# EAGLE board PCB (EAGLE 9.7.0)
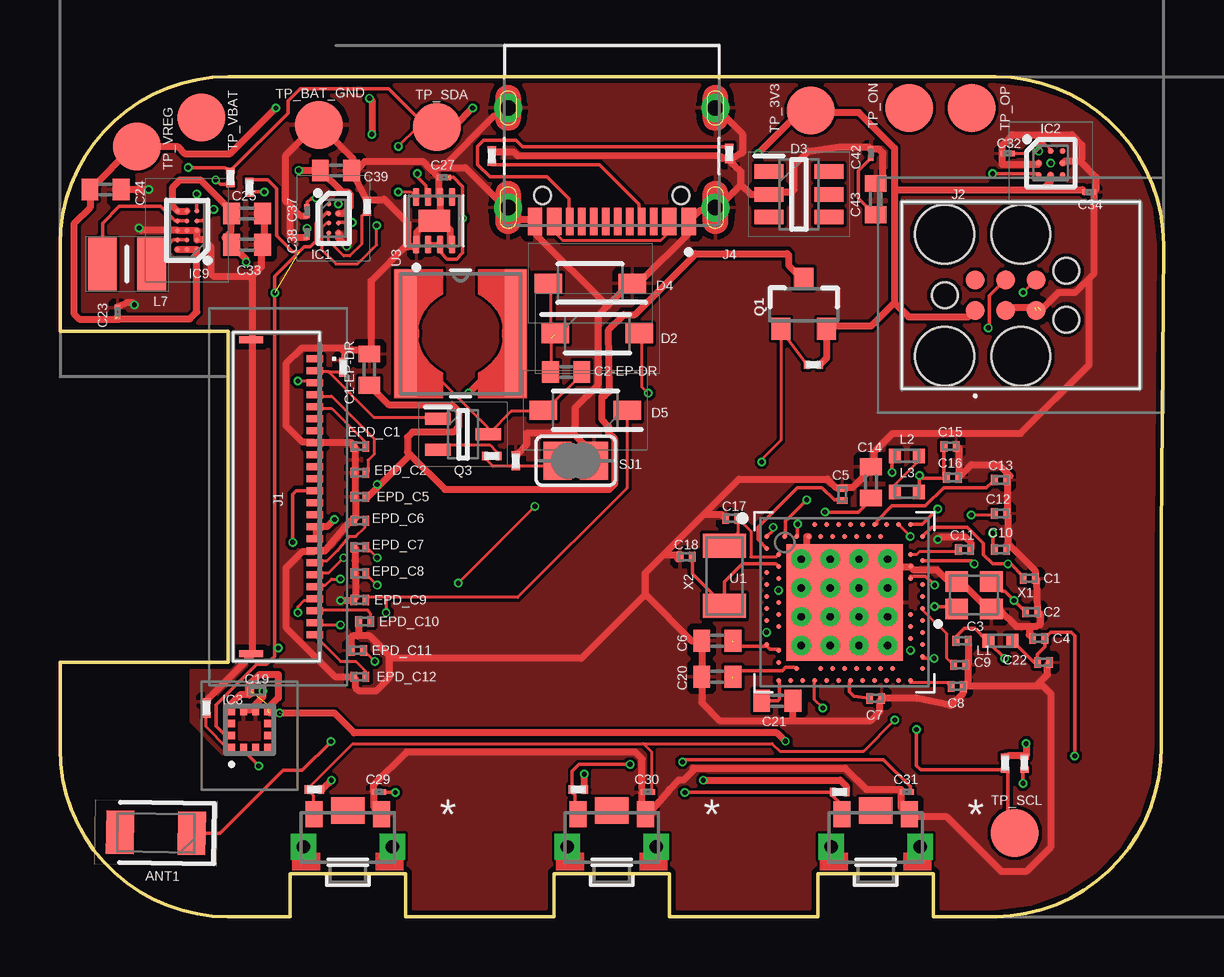
[diagram p0: board, top side]
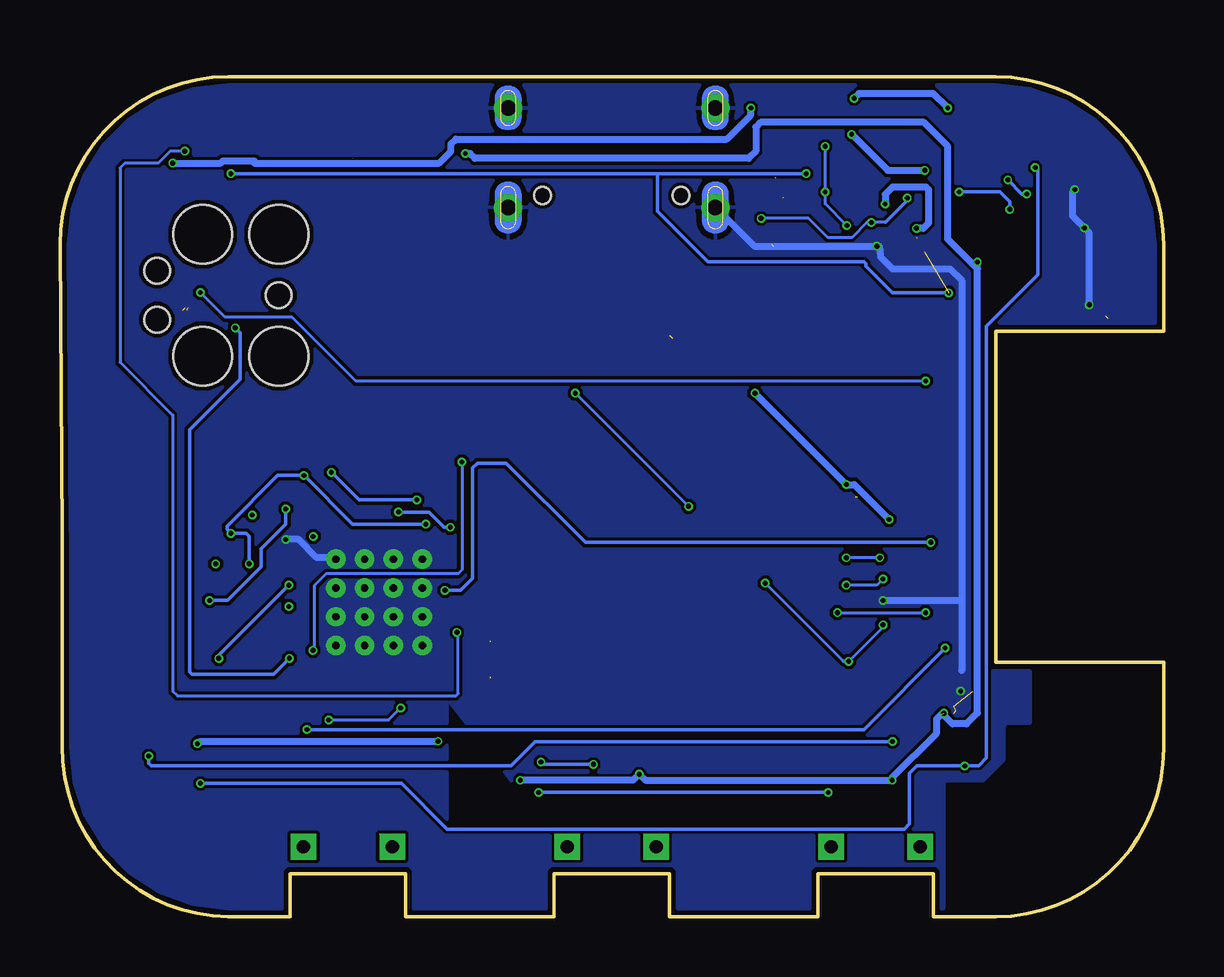
[diagram p1: board, bottom side, seen from below]

Size 46 x 35 mm. Coordinates in mm from the lower left corner, seen from the top.
Outline: 39,0 36.4,0 36.4,1.8 31.6,1.8 31.6,0 25.4,0 25.4,1.8 20.6,1.8 20.6,0 14.4,0 14.4,1.8 9.6,1.8 9.6,0 7,0 arc-90 0,7 0,10.6 7,10.6 7,24.4 0,24.4 0,28 arc-90 7,35 39,35 arc-90 46,28 45.9,15.9 45.9,7.1 arc-90 39,0
Copper layers (1+2*63+16): Top / GND / Bottom / layer 63
Stack-up 4 Layer Stack: Top SilkScreen Epoxy Ink / Top SolderMask User Defined 0.02mm Dk 4.3 / Top Surface Finish Lead-Free 0.02mm / Top User Defined 0.03mm / Dielectric-1 User Defined 0.034mm / Dielectric-2 User Defined 0.034mm / GND User Defined 0.03mm / Dielectric-3 User Defined 0.664mm / Power User Defined 0.03mm / Dielectric-4 User Defined 0.034mm / Dielectric-5 User Defined 0.034mm / Bottom User Defined 0.03mm / Bottom Surface Finish Lead-Free 0.02mm / Bottom SolderMask User Defined 0.02mm Dk 4.3 / Bottom SilkScreen Epoxy Ink
Design rules: minimum copper width 5mil, minimum drill size 0.2mm, copper clearance wire_polygon to wire_polygon 5mil, copper clearance wire_polygon to pad_smd 5mil, copper clearance wire_polygon to via 5mil, copper clearance pad_smd to pad_smd 5mil, copper clearance pad_smd to via 5mil, copper clearance via to via 5mil, copper clearance smd to pad (same net) 5mil, copper clearance smd to via (same net) 5mil, copper clearance smd to smd (same net) 5mil, dimension clearance 0.2mm, via restrict clearance 0mil, restrict clearance 0mil, drill distance 6mil, keepout clearance 0mil

## Footprints (pad centres in the part's own frame; a part is rotated, then mirrored left to right if it is on the bottom)
2450AT18B100E_ANTC3216X140N = smd 1.15 x 1.8: 1 -1.5,0; 2 1.5,0
NORDIC_NRF_3_RESC0201_L = smd 0.28 x 0.43: 1 -0.255,0; 2 0.255,0
ESP32_C6_LIBRARY_1_ESP32_WROVER_EAGLE-LTSPICE_C0402 = smd 0.7 x 0.9: 1 -0.65,0; 2 0.65,0
GRM011R60J152KE01L_2_CAPC0201X13N = smd 0.22 x 0.23: 1 -0.185,0; 2 0.185,0
ESP32_C6_LIBRARY_5_SOD3716X135N = smd 1.15 x 0.8: 1 -1.75,0; 2 1.75,0
ESP32_C6_LIBRARY_3_SOT95P280X145-6N = smd 1.2 x 0.6: 1 -1.25,0.95; 2 -1.25,0; 3 -1.25,-0.95; 4 1.25,-0.95; 5 1.25,0; 6 1.25,0.95
BQ25180YBGR_BGA8C40P2X4_100X155X50 = smd 0.2 x 0.2: A1 -0.2,0.6; A2 0.2,0.6; B1 -0.2,0.2; B2 0.2,0.2; C1 -0.2,-0.2; C2 0.2,-0.2; D1 -0.2,-0.6; D2 0.2,-0.6
DRV2605YZFR_BGA9C50P3X3_144X144X62 = smd 0.25 x 0.25: A1 -0.5,0.5; A2 0,0.5; A3 0.5,0.5; B1 -0.5,0; B2 0,0; B3 0.5,0; C1 -0.5,-0.5; C2 0,-0.5; C3 0.5,-0.5
BMA423_BMA423 = smd 0.3 x 0.35: 1 -0.75,-0.775; 2 -0.25,-0.775; 3 0.25,-0.775; 4 0.75,-0.775; 7 0.75,0.775; 8 0.25,0.775; 9 -0.25,0.775; 10 -0.75,0.775 | smd 0.35 x 0.3: 5 0.775,-0.25; 6 0.775,0.25; 11 -0.775,0.25; 12 -0.775,-0.25
RT6160AWSC_BGA15C40P3X5_140X230X60 = smd 0.216 x 0.216: A1 -0.4,0.8; A2 0,0.8; A3 0.4,0.8; B1 -0.4,0.4; B2 0,0.4; B3 0.4,0.4; C1 -0.4,0; C2 0,0; C3 0.4,0; D1 -0.4,-0.4; D2 0,-0.4; D3 0.4,-0.4; E1 -0.4,-0.8; E2 0,-0.8; E3 0.4,-0.8
503480-2400_5034802400 = smd 0.3 x 0.7: 1 -5.75,1.525; 2 -5.25,1.525; 3 -4.75,1.525; 4 -4.25,1.525; 5 -3.75,1.525; 6 -3.25,1.525; 7 -2.75,1.525; 8 -2.25,1.525; 9 -1.75,1.525; 10 -1.25,1.525; 11 -0.75,1.525; 12 -0.25,1.525; 13 0.25,1.525; 14 0.75,1.525; 15 1.25,1.525; 16 1.75,1.525; 17 2.25,1.525; 18 2.75,1.525; 19 3.25,1.525; 20 3.75,1.525; 21 4.25,1.525; 22 4.75,1.525; 23 5.25,1.525; 24 5.75,1.525 | smd 0.3 x 1: MP1 -6.54,-1.125; MP2 6.54,-1.125
TC2030-IDC_TC2030IDC = smd 0.783 x 0.783: 1 -0.953,-0.635; 2 -0.953,0.635; 3 0.317,-0.635; 4 0.317,0.635; 5 1.588,-0.635; 6 1.588,0.635 | hole 2.451: -2.223,-2.54; -2.223,2.54; 0.952,-2.54; 0.952,2.54 | hole 1.067: -2.223,0; 2.857,-1.016; 2.857,1.016
KH-TYPE-C-16P_KINGHELM_KH-TYPE-C-16P = smd 0.6 x 1.15: A1_B12 -3.2,4.725; A4_B9 -2.4,4.725; A9_B4 2.4,4.725; A12_B1 3.2,4.725 | smd 0.3 x 1.15: A5 -1.25,4.725; A6 -0.25,4.725; A7 0.25,4.725; A8 1.25,4.725; B5 1.75,4.725; B6 0.75,4.725; B7 -0.75,4.725; B8 -1.75,4.725 | drill 0.65 pad 1.05: SH1 -4.32,0; SH2 4.32,0; SH3 -4.32,4.15; SH4 4.32,4.15 | hole 0.7: -2.89,3.65; 2.89,3.65
NORDIC_NRF_2_RESC0402_L = smd 0.5 x 0.6: 1 -0.5,0; 2 0.5,0
ESP32_C6_LIBRARY_2_IND_4828-WE-TPC_WRE = smd 0.9 x 5.3: 1 -2.286,0; 2 2.286,0
MLP2016SR47MT0S1_INDC2016X100N = smd 1.2 x 2.2: 1 -1.028,0; 2 1.028,0
ESP32_C6_LIBRARY_4_ESP32_C6_LIBRARY_4_ESP32_C6_LIBRARY_4_ESP32_C6_LIBRARY_4_ESP32_WROVER_SPARKFUN-DISCRETESEMI_SOT23-3 = smd 0.8 x 0.9: 1 -0.95,-1; 2 0.95,-1; 3 0,1.1
ESP32_C6_LIBRARY_6_SOT65P210X110-3N = smd 1.05 x 0.5: 1 -1.05,0.65; 2 -1.05,-0.65; 3 1.05,0
CPF0201D7K68C1_0201 = smd 0.35 x 0.25: 1 0,0.275; 2 0,-0.275
ESP32_C6_LIBRARY_7_JUMPER_SJ = smd 1.168 x 1.6: 1 -0.762,0; 2 0.762,0
2025-10-22_07-23-44_LIBRARY_SW_EVP-AKE31A_PAN = smd 0.711 x 1.092: 1 -1.4,-0.972; 2 1.4,-0.972 | drill 0.559 pad 0.914 square: 3 -1.848,0.381; 4 1.848,0.381 | smd 1.397 x 1.092: 5 0,-1.124
HECTOR_WATCH_1_TP20R = smd 2 x 2: TP 0,0
NORDIC_NRF_4_AQFN50P700X700X85_HS-74N = smd 4.85 x 4.85: P$74 0,0 | drill 0.3 pad 0.6: P$75 -1.8,1.8; P$76 -0.6,1.8; P$77 0.6,1.8; P$78 1.8,1.8; P$79 -1.8,0.6; P$80 -0.6,0.6; P$81 0.6,0.6; P$82 1.8,0.6; P$83 -1.8,-0.6; P$84 -0.6,-0.6; P$85 0.6,-0.6; P$86 1.8,-0.6; P$87 -1.8,-1.8; P$88 -0.6,-1.8; P$89 0.6,-1.8; P$90 1.8,-1.8 | smd 0.2 x 0.2: P$A8 -1.25,3.25; P$A10 -0.75,3.25; P$A12 -0.25,3.25; P$A14 0.25,3.25; P$A16 0.75,3.25; P$A18 1.25,3.25; P$A20 1.75,3.25; P$A22 2.25,3.25; P$A23 2.75,3.25; P$AA24 3.25,-2.25; P$AB2 -2.75,-2.5; P$AC5 -2,-2.75; P$AC9 -1,-2.75; P$AC11 -0.5,-2.75; P$AC13 0,-2.75; P$AC15 0.5,-2.75; P$AC17 1,-2.75; P$AC19 1.5,-2.75; P$AC21 2,-2.75; P$AC24 3.25,-2.75; P$AD2 -2.75,-3.25; P$AD4 -2.25,-3.25; P$AD6 -1.75,-3.25; P$AD8 -1.25,-3.25; P$AD10 -0.75,-3.25; P$AD12 -0.25,-3.25; P$AD14 0.25,-3.25; P$AD16 0.75,-3.25; P$AD18 1.25,-3.25; P$AD20 1.75,-3.25; P$AD22 2.25,-3.25; P$AD23 2.75,-3.25; P$B1 -3.25,2.75; P$B3 -2.5,2.75; P$B5 -2,2.75; P$B7 -1.5,2.75; P$B9 -1,2.75; P$B11 -0.5,2.75; P$B13 0,2.75; P$B15 0.5,2.75; P$B17 1,2.75; P$B19 1.5,2.75; P$B24 3.25,2.75; P$C1 -3.25,2.25; P$D2 -2.75,2; P$D23 2.75,2; P$E24 3.25,1.75; P$F2 -2.75,1.5; P$F23 2.75,1.5; P$G1 -3.25,1.25; P$H2 -2.75,1; P$H23 2.75,1; P$J1 -3.25,0.75; P$J24 3.25,0.75; P$K2 -2.75,0.5; P$L1 -3.25,0.25; P$L24 3.25,0.25; P$M2 -2.75,0; P$N1 -3.25,-0.25; P$N24 3.25,-0.25; P$P2 -2.75,-0.5; P$P23 2.75,-0.5; P$R1 -3.25,-0.75; P$R24 3.25,-0.75; P$T2 -2.75,-1; P$T23 2.75,-1; P$U1 -3.25,-1.25; P$U24 3.25,-1.25; P$V23 2.75,-1.5; P$W1 -3.25,-1.75; P$W24 3.25,-1.75; P$Y2 -2.75,-2; P$Y23 2.75,-2
ESP32_C6_LIBRARY_SON50P200X200X80-9N = smd 0.76 x 0.27: 1 -0.985,0.75; 2 -0.985,0.25; 3 -0.985,-0.25; 4 -0.985,-0.75; 5 0.985,-0.75; 6 0.985,-0.25; 7 0.985,0.25; 8 0.985,0.75 | smd 0.9 x 1.3: 9 0,0
NORDIC_NRF_BT-XTAL_2016_N = smd 0.95 x 0.85: 1 -0.725,-0.575; 2 0.725,-0.575; 3 0.725,0.575; 4 -0.725,0.575
NORDIC_NRF_1_XTAL_3215_N = smd 1 x 1.8: 1 -1.25,0; 2 1.25,0

## Placement (x,y rotation side)
ANT1  2450AT18B100E  [2450AT18B100E_ANTC3216X140N]  4,3.5 179.2 top
C1  12pF  [NORDIC_NRF_3_RESC0201_L]  40.4,14.1 0 top
C1-EP-DR  10µF  [ESP32_C6_LIBRARY_1_ESP32_WROVER_EAGLE-LTSPICE_C0402]  12.9,22.8 90 top
C2  12pF  [NORDIC_NRF_3_RESC0201_L]  40.5,12.7 0 top
C2-EP-DR  4.7µF/25V  [ESP32_C6_LIBRARY_1_ESP32_WROVER_EAGLE-LTSPICE_C0402]  21.1,22.7 0 top
C3  1pF  [NORDIC_NRF_3_RESC0201_L]  37.6,11.5 0 top
C4  1pF  [NORDIC_NRF_3_RESC0201_L]  40.8,11.6 180 top
C5  100nF  [NORDIC_NRF_3_RESC0201_L]  32.6,17.6 90 top
C6  4.7µF  [ESP32_C6_LIBRARY_1_ESP32_WROVER_EAGLE-LTSPICE_C0402]  27.4,11.5 180 top
C7  100nF  [NORDIC_NRF_3_RESC0201_L]  34,9.1 0 top
C8  100nF  [NORDIC_NRF_3_RESC0201_L]  37.4,9.6 0 top
C9  820pF N.C.  [NORDIC_NRF_3_RESC0201_L]  37.5,10.5 0 top
C10  N.C.  [NORDIC_NRF_3_RESC0201_L]  39.2,15.3 0 top
C11  100pF  [NORDIC_NRF_3_RESC0201_L]  37.7,15.3 0 top
C12  100nF  [NORDIC_NRF_3_RESC0201_L]  39.2,16.8 0 top
C13  N.C.  [NORDIC_NRF_3_RESC0201_L]  39.2,18.2 0 top
C14  4.7µF  [ESP32_C6_LIBRARY_1_ESP32_WROVER_EAGLE-LTSPICE_C0402]  33.8,18.1 90 top
C15  1.0µF  [NORDIC_NRF_3_RESC0201_L]  37.1,19.6 0 top
C16  47nF  [NORDIC_NRF_3_RESC0201_L]  37.2,18.3 0 top
C17  12pF  [NORDIC_NRF_3_RESC0201_L]  28,16.6 0 top
C18  12pF  [NORDIC_NRF_3_RESC0201_L]  26.1,15 0 top
C19  100nF  [NORDIC_NRF_3_RESC0201_L]  8.2,9.4 0 top
C20  4.7µF  [ESP32_C6_LIBRARY_1_ESP32_WROVER_EAGLE-LTSPICE_C0402]  27.4,10 180 top
C21  4.7µF  [ESP32_C6_LIBRARY_1_ESP32_WROVER_EAGLE-LTSPICE_C0402]  29.9,9 0 top
C22  N.C.  [NORDIC_NRF_3_RESC0201_L]  41,10.6 0 top
C23  0.1uF  [GRM011R60J152KE01L_2_CAPC0201X13N]  2.4,25.2 90 top
C24  10µF  [ESP32_C6_LIBRARY_1_ESP32_WROVER_EAGLE-LTSPICE_C0402]  1.9,30.3 180 top
C25  22µF  [ESP32_C6_LIBRARY_1_ESP32_WROVER_EAGLE-LTSPICE_C0402]  7.8,29.3 0 top
C27  0.1uF  [GRM011R60J152KE01L_2_CAPC0201X13N]  16,30.8 0 top
C29  1uF  [GRM011R60J152KE01L_2_CAPC0201X13N]  13.3,5.2 0 top
C30  1uF  [GRM011R60J152KE01L_2_CAPC0201X13N]  24.5,5.2 0 top
C31  1uF  [GRM011R60J152KE01L_2_CAPC0201X13N]  35.3,5.2 0 top
C32  1uF  [GRM011R60J152KE01L_2_CAPC0201X13N]  39.5,31.8 0 top
C33  22µF  [ESP32_C6_LIBRARY_1_ESP32_WROVER_EAGLE-LTSPICE_C0402]  7.8,28 0 top
C34  0.1uF  [GRM011R60J152KE01L_2_CAPC0201X13N]  42.9,30.2 180 top
C37  1uF  [GRM011R60J152KE01L_2_CAPC0201X13N]  10.3,29.4 90 top
C38  1uF  [GRM011R60J152KE01L_2_CAPC0201X13N]  10.3,28.5 90 top
C39  10µF  [ESP32_C6_LIBRARY_1_ESP32_WROVER_EAGLE-LTSPICE_C0402]  11.5,31.1 0 top
C42  0.1uF  [GRM011R60J152KE01L_2_CAPC0201X13N]  33.8,31.8 90 top
C43  4.7µF  [ESP32_C6_LIBRARY_1_ESP32_WROVER_EAGLE-LTSPICE_C0402]  34,29.9 90 top
D2  MBR0530  [ESP32_C6_LIBRARY_5_SOD3716X135N]  22.4,24.3 0 top
D3  USBLC6-2SC6Y  [ESP32_C6_LIBRARY_3_SOT95P280X145-6N]  30.8,30.1 0 top
D4  MBR0530  [ESP32_C6_LIBRARY_5_SOD3716X135N]  22.1,26.4 180 top
D5  MBR0530  [ESP32_C6_LIBRARY_5_SOD3716X135N]  21.9,21.1 180 top
EPD_C1  1uF/50V  [NORDIC_NRF_3_RESC0201_L]  12.5,19.6 0 top
EPD_C2  1uF/50V  [NORDIC_NRF_3_RESC0201_L]  12.5,18.5 0 top
EPD_C5  1uF/50V  [NORDIC_NRF_3_RESC0201_L]  12.5,17.5 0 top
EPD_C6  1uF/50V  [NORDIC_NRF_3_RESC0201_L]  12.5,16.5 0 top
EPD_C7  1uF/50V  [NORDIC_NRF_3_RESC0201_L]  12.5,15.4 0 top
EPD_C8  1uF/50V  [NORDIC_NRF_3_RESC0201_L]  12.5,14.3 0 top
EPD_C9  1uF/50V  [NORDIC_NRF_3_RESC0201_L]  12.5,13.2 0 top
EPD_C10  1uF/50V  [NORDIC_NRF_3_RESC0201_L]  12.7,12.3 0 top
EPD_C11  1uF/50V  [NORDIC_NRF_3_RESC0201_L]  12.4,11.1 0 top
EPD_C12  1uF/50V  [NORDIC_NRF_3_RESC0201_L]  12.5,10 0 top
IC1  BQ25180YBGR  [BQ25180YBGR_BGA8C40P2X4_100X155X50]  11.4,29.1 0 top
IC2  DRV2605YZFR  [DRV2605YZFR_BGA9C50P3X3_144X144X62]  41.3,31.4 0 top
IC3  BMA421  [BMA423_BMA423]  7.9,7.8 0 top
IC9  RT6160AWSC  [RT6160AWSC_BGA15C40P3X5_140X230X60]  5.3,28.6 180 top
J1  503480-2400  [503480-2400_5034802400]  9.1,17.5 270 top
J2  TC2030-IDC  [TC2030-IDC_TC2030IDC]  39.1,25.9 0 top
J4  KH-TYPE-C-16P  [KH-TYPE-C-16P_KINGHELM_KH-TYPE-C-16P]  23,33.7 180 top
L1  3.9nH  [NORDIC_NRF_2_RESC0402_L]  39.2,11.5 0 top
L2  10µH  [NORDIC_NRF_2_RESC0402_L]  35.3,19.2 0 top
L3  15nH  [NORDIC_NRF_2_RESC0402_L]  35.3,17.7 0 top
L5  68uH  [ESP32_C6_LIBRARY_2_IND_4828-WE-TPC_WRE]  16.7,24.3 0 top
L7  FTC252012SR47MBCA  [MLP2016SR47MT0S1_INDC2016X100N]  2.8,27.2 180 top
Q1  20V/4.2A/52mΩ/1.4W  [ESP32_C6_LIBRARY_4_ESP32_C6_LIBRARY_4_ESP32_C6_LIBRARY_4_ESP32_C6_LIBRARY_4_ESP32_WROVER_SPARKFUN-DISCRETESEMI_SOT23-3]  31,25.5 0 top
Q3  SI1308EDL-T1-GE3  [ESP32_C6_LIBRARY_6_SOT65P210X110-3N]  16.8,20.1 0 top
R1_EP_DR  0.47  [CPF0201D7K68C1_0201]  18,19.2 90 top
R1_USB  5K1  [CPF0201D7K68C1_0201]  18,31.7 0 top
R2  0  [CPF0201D7K68C1_0201]  7.1,30.8 0 top
R2_EP_DR  10K  [CPF0201D7K68C1_0201]  11.8,22.9 0 top
R2_USB  5K1  [CPF0201D7K68C1_0201]  27.9,31.8 0 top
R3  0  [CPF0201D7K68C1_0201]  6.1,8.7 0 top
R4  0  [CPF0201D7K68C1_0201]  7.9,30.4 0 top
R5  10K  [CPF0201D7K68C1_0201]  10.6,5.3 90 top
R7  10K  [CPF0201D7K68C1_0201]  32.5,5.2 90 top
R8  10K  [CPF0201D7K68C1_0201]  21.6,5.3 90 top
R9  10K  [CPF0201D7K68C1_0201]  12.8,29.6 0 top
R17  3K3  [CPF0201D7K68C1_0201]  39.4,6.4 0 top
R18  3K3  [CPF0201D7K68C1_0201]  40.2,6.4 0 top
R_PWR_EPD  0  [CPF0201D7K68C1_0201]  31.4,23 90 top
R_TYPE_SEL  2.2  [CPF0201D7K68C1_0201]  19,19 0 top
SJ1  [ESP32_C6_LIBRARY_7_JUMPER_SJ]  21.5,19 180 top
SW_DW  C30  [2025-10-22_07-23-44_LIBRARY_SW_EVP-AKE31A_PAN]  34,3.3 180 top
SW_ENT  C30  [2025-10-22_07-23-44_LIBRARY_SW_EVP-AKE31A_PAN]  23,3.3 180 top
SW_UP  C30  [2025-10-22_07-23-44_LIBRARY_SW_EVP-AKE31A_PAN]  12,3.3 180 top
TP_3V3  HECTOR_WATCH_1_TPTP20R  [HECTOR_WATCH_1_TP20R]  31.3,33.6 0 top
TP_BAT_GND  HECTOR_WATCH_1_TPTP20R  [HECTOR_WATCH_1_TP20R]  10.8,33 0 top
TP_ON  HECTOR_WATCH_1_TPTP20R  [HECTOR_WATCH_1_TP20R]  35.4,33.7 0 top
TP_OP  HECTOR_WATCH_1_TPTP20R  [HECTOR_WATCH_1_TP20R]  38,33.7 0 top
TP_SCL  HECTOR_WATCH_1_TPTP20R  [HECTOR_WATCH_1_TP20R]  39.8,3.5 0 top
TP_SDA  HECTOR_WATCH_1_TPTP20R  [HECTOR_WATCH_1_TP20R]  15.7,32.9 0 top
TP_VBAT  HECTOR_WATCH_1_TPTP20R  [HECTOR_WATCH_1_TP20R]  5.9,33.3 0 top
TP_VREG  HECTOR_WATCH_1_TPTP20R  [HECTOR_WATCH_1_TP20R]  3.2,32.1 0 top
U1  NRF52840_QF  [NORDIC_NRF_4_AQFN50P700X700X85_HS-74N]  32.7,13.1 0 top
U3  MAX17048G+T10  [ESP32_C6_LIBRARY_SON50P200X200X80-9N]  15.6,29 90 top
X1  32MHz  [NORDIC_NRF_BT-XTAL_2016_N]  38.1,13.4 0 top
X2  32.768kHz  [NORDIC_NRF_1_XTAL_3215_N]  27.7,14.2 270 top

## Library data of the parts
ANT1 = InkTime_v5; ARROW_PART_NUMBER: 2450AT18B100E; ARROW_PRICE-STOCK: https://www.arrow.com/en/products/2450at18b100e/johanson-dielectrics?utm_currency=USD&region=nac; DESCRIPTION: Antennas 2.45GHz ANTENNA; HEIGHT: 1.4mm; MANUFACTURER_NAME: JOHANSON TECHNOLOGY; MANUFACTURER_PART_NUMBER: 2450AT18B100E; MOUSER_PART_NUMBER: 609-2450AT18B100E; MOUSER_PRICE-STOCK: https://www.mouser.co.uk/ProductDetail/Johanson-Technology/2450AT18B100E?qs=yCnrNFeXz%252Bh5MFsFIXGZGA%3D%3D
C1-C5 C7-C13 C15-C19 C22 EPD_C1 EPD_C2 EPD_C5-EPD_C12 L1-L3 R1_EP_DR R1_USB R2 R2_EP_DR R2_USB R3-R5 R7-R9 R17 R18 R_PWR_EPD R_TYPE_SEL SJ1 TP_3V3 TP_BAT_GND TP_ON TP_OP TP_SCL TP_SDA TP_VBAT TP_VREG U1 X1 X2 = InkTime_v5
C1-EP-DR C2-EP-DR C6 C14 C20 C21 C24 C25 C33 C39 C43 = InkTime_v5; SPICEMODEL: NONE; SPICEPREFIX: C
C23 C27 C29-C32 C34 C37 C38 C42 = InkTime_v5; AVAILABILITY: In Stock; CHECK_PRICES: https://www.snapeda.com/parts/GRM011R60J152KE01L/Murata/view-part/?ref=eda; DESCRIPTION: SMD Capacitor X5R(EIA) with Capacitance: 1500pF Tol. 10%. Rated Voltage: 6.3Vdc; MF: Murata; MP: GRM011R60J152KE01L; PACKAGE: 0201 Murata; PRICE: None; SNAPEDA_LINK: https://www.snapeda.com/parts/GRM011R60J152KE01L/Murata/view-part/?ref=snap
D2 D4 D5 = InkTime_v5; AVAILABILITY: In Stock; CHECK_PRICES: https://www.snapeda.com/parts/MBR0530/Onsemi/view-part/?ref=eda; DESCRIPTION: Diode Schottky 30 V 500mA Surface Mount SOD-123; MF: ON Semiconductor; MP: MBR0530; PACKAGE: SOD-123-2 ON Semiconductor; PRICE: None; PURCHASE-URL: https://www.snapeda.com/api/url_track_click_mouser/?unipart_id=179458&manufacturer=ON Semiconductor&part_name=MBR0530&search_term=None; SNAPEDA_LINK: https://www.snapeda.com/parts/MBR0530/Onsemi/view-part/?ref=snap
D3 = InkTime_v5; AVAILABILITY: In Stock; CHECK_PRICES: https://www.snapeda.com/parts/USBLC6-2SC6Y/STMicroelectronics/view-part/?ref=eda; DESCRIPTION: 17V Clamp 5A (8/20µs) Ipp Tvs Diode Surface Mount SOT-23-6; MF: STMicroelectronics; MP: USBLC6-2SC6Y; PACKAGE: SOT-23-6 STMicroelectronics; PRICE: None; SNAPEDA_LINK: https://www.snapeda.com/parts/USBLC6-2SC6Y/STMicroelectronics/view-part/?ref=snap
IC1 = InkTime_v5; ARROW_PART_NUMBER: BQ25180YBGR; ARROW_PRICE-STOCK: https://www.arrow.com/en/products/bq25180ybgr/texas-instruments?utm_currency=USD&region=nac; DESCRIPTION: Charger IC Lithium Ion/Polymer, Lithium Iron Phosphate 8-DSBGA (1.6x1.1); HEIGHT: 0.5mm; MANUFACTURER_NAME: Texas Instruments; MANUFACTURER_PART_NUMBER: BQ25180YBGR; MOUSER_PART_NUMBER: 595-BQ25180YBGR; MOUSER_PRICE-STOCK: https://www.mouser.co.uk/ProductDetail/Texas-Instruments/BQ25180YBGR?qs=doiCPypUmgEWjAK%252BJAX6Tw%3D%3D
IC2 = InkTime_v5; ARROW_PART_NUMBER: DRV2605YZFR; ARROW_PRICE-STOCK: https://www.arrow.com/en/products/drv2605yzfr/texas-instruments?region=nac; DESCRIPTION: Haptic Driver for ERM/LRA with Built-In Library and Smart Loop Architecture; HEIGHT: 0.625mm; MANUFACTURER_NAME: Texas Instruments; MANUFACTURER_PART_NUMBER: DRV2605YZFR
IC3 = InkTime_v5; ARROW_PART_NUMBER: BMA423; ARROW_PRICE-STOCK: https://www.arrow.com/en/products/bma423/bosch; DESCRIPTION: Accelerometers Triaxial low-g 12bit Acceleration Sensor; HEIGHT: 1mm; MANUFACTURER_NAME: BOSCH; MANUFACTURER_PART_NUMBER: BMA423; MOUSER_PART_NUMBER: 262-BMA423; MOUSER_PRICE-STOCK: https://www.mouser.co.uk/ProductDetail/Bosch-Sensortec/BMA423?qs=HXFqYaX1Q2xC%252BSgeGoX3mg%3D%3D
IC9 = InkTime_v5; DESCRIPTION: Buck-Boost Regulator Positive Output Step-Up/Step-Down I2C DC-DC Controller IC 15-WL-CSP (BSC) (1.4x2.3); HEIGHT: 0.6mm; MANUFACTURER_NAME: RICHTEK; MANUFACTURER_PART_NUMBER: RT6160AWSC; MOUSER_PART_NUMBER: 835-RT6160AWSC; MOUSER_PRICE-STOCK: https://www.mouser.co.uk/ProductDetail/Richtek/RT6160AWSC?qs=amGC7iS6iy%2FLd9PSoixZXQ%3D%3D
J1 = InkTime_v5; DESCRIPTION: FFC & FPC Connectors 0.5mm FPC RA SMT Dual Contact 24Ckt; HEIGHT: 1.87mm; MANUFACTURER_NAME: Molex; MANUFACTURER_PART_NUMBER: 503480-2400; MOUSER_PART_NUMBER: 538-503480-2400; MOUSER_PRICE-STOCK: https://www.mouser.co.uk/ProductDetail/Molex/503480-2400?qs=OAhjpuo3Vu7efIoxFh9AOw%3D%3D
J2 = InkTime_v5; DESCRIPTION: CABLE ADAPTER 6 POS; HEIGHT: 19mm; MANUFACTURER_NAME: Tag Connect; MANUFACTURER_PART_NUMBER: TC2030-IDC
J4 = InkTime_v5; AVAILABILITY: Not in stock; CHECK_PRICES: https://www.snapeda.com/parts/KH-TYPE-C-16P/Kinghelm/view-part/?ref=eda; MF: kinghelm; MP: KH-TYPE-C-16P; PACKAGE: None; PRICE: None; SNAPEDA_LINK: https://www.snapeda.com/parts/KH-TYPE-C-16P/Kinghelm/view-part/?ref=snap
L5 = InkTime_v5; COPYRIGHT: Copyright (C) 2024 Ultra Librarian. All rights reserved.; MANUFACTURER_PART_NUMBER: 744043680; MFR_NAME: Wurth Electronics
L7 = InkTime_v5; DESCRIPTION: SMD / SMT Inductors (Coils), L=0.47?H, L x W x T :; HEIGHT: 1mm; JLCPCB: https://jlcpcb.com/partdetail/6763488-FTC252012SR47MBCA/C5832368; MANUFACTURER_NAME: TDK; MANUFACTURER_PART_NUMBER: FTC252012SR47MBCA
Q1 = InkTime_v5; PROD_ID: TRAN-14388
Q3 = InkTime_v5; AVAILABILITY: In Stock; CHECK_PRICES: https://www.snapeda.com/parts/SI1308EDL-T1-GE3/Vishay+Siliconix/view-part/?ref=eda; DESCRIPTION: Si1308EDL-T1-GE3 N-channel MOSFET Transistor, 1.5 A, 30 V, 3-Pin SC-70 | Siliconix / Vishay SI1308EDL-T1-GE3; MF: Vishay Siliconix; MP: SI1308EDL-T1-GE3; PACKAGE: SOT-323 Vishay Semiconductor; PRICE: None; PURCHASE-URL: https://www.snapeda.com/api/url_track_click_mouser/?unipart_id=274603&manufacturer=Vishay Siliconix&part_name=SI1308EDL-T1-GE3&search_term=None; SNAPEDA_LINK: https://www.snapeda.com/parts/SI1308EDL-T1-GE3/Vishay+Siliconix/view-part/?ref=snap
SW_DW SW_ENT SW_UP = InkTime_v5; COPYRIGHT: Copyright (C) 2025 Ultra Librarian. All rights reserved.; DIGI-KEY_PART_NUMBER_1: P123437TR-ND; DIGI-KEY_PART_NUMBER_2: P123437CT-ND; DIGI-KEY_PART_NUMBER_3: P123437DKR-ND; MANUFACTURER_NAME: Panasonic; MANUFACTURER_PART_NUMBER: EVP-AKE31A
U3 = InkTime_v5; AVAILABILITY: In Stock; CHECK_PRICES: https://www.snapeda.com/parts/MAX17048G+T10/Analog+Devices/view-part/?ref=eda; DESCRIPTION: 3µA 1-Cell/2-Cell Fuel Gauge with ModelGauge; MF: Analog Devices; MP: MAX17048G+T10; PACKAGE: TDFN-8 Maxim; PRICE: None; PURCHASE-URL: https://www.snapeda.com/api/url_track_click_mouser/?unipart_id=329239&manufacturer=Analog Devices&part_name=MAX17048G+T10&search_term=None; SNAPEDA_LINK: https://www.snapeda.com/parts/MAX17048G+T10/Analog+Devices/view-part/?ref=snap

## Nets
3V3: C19.1 C25.1 C33.1 C34.2 IC2.C2 IC3.7 IC3.10 IC9.E2 IC9.E3 J2.1 Q1.2 R5.2 R7.2 R8.2 R17.1 R18.1 R_PWR_EPD.2 TP_3V3.TP
ALERT: U3.5
D+: U1.P$AD6
D-: U1.P$AD4
EPD_3V3: C1-EP-DR.1 EPD_C5.2 J1.15 J1.16 L5.2 Q1.3
EPD_BUSY: J1.9
EPD_CS: J1.12 U1.P$K2
EPD_DC: J1.11
EPD_RST: J1.10
GDR: J1.2 Q3.1 R2_EP_DR.2
GND: C1-EP-DR.2 C1.2 C2.2 C3.2 C4.2 C5.2 C6.2 C7.2 C8.2 C9.2 C10.2 C11.2 C12.2 C13.2 C14.2 C15.2 C16.2 C17.1 C18.1 C19.2 C20.2 C21.2 C22.2 C23.2 C24.1 C25.2 C27.1 C29.1 C30.1 C31.1 C32.1 C33.2 C34.1 C37.1 C38.1 C39.2 C42.2 C43.2 D3.2 D4.1 EPD_C1.1 EPD_C2.1 EPD_C5.1 EPD_C6.1 EPD_C7.1 EPD_C8.1 EPD_C9.1 EPD_C10.1 EPD_C11.1 EPD_C12.1 IC1.D2 IC2.B1 IC2.B3 IC3.8 IC3.9 IC9.B1 IC9.C1 IC9.C2 IC9.C3 J1.8 J1.17 J1.MP1 J1.MP2 J2.3 J2.5 J4.A1_B12 J4.A12_B1 J4.SH1 J4.SH2 J4.SH3 J4.SH4 R1_USB.1 R2_EP_DR.1 R2_USB.2 R3.1 R9.1 R_TYPE_SEL.1 SJ1.1 SW_DW.1 SW_ENT.1 SW_UP.1 TP_BAT_GND.TP U1.P$74 U1.P$75 U1.P$76 U1.P$77 U1.P$78 U1.P$79 U1.P$80 U1.P$81 U1.P$82 U1.P$83 U1.P$84 U1.P$85 U1.P$86 U1.P$87 U1.P$88 U1.P$89 U1.P$90 U1.P$B7 U1.P$F23 U3.1 U3.4 U3.6 U3.9 X1.2 X1.4
HAPTIC_EN: IC2.A1 U1.P$U1
IMU_INT1: IC3.5
IMU_INT2: IC3.6
LX1: IC9.B2 IC9.B3 L7.1
LX2: IC9.D2 IC9.D3 L7.2
MOSI: J1.14
N$2: IC3.1 R3.2
N$3: C2-EP-DR.2 D5.2 L5.1 Q3.3
N$4: IC3.3
N$5: C2-EP-DR.1 D2.1 D4.2
N$6: IC9.D1 R4.2
N$7: IC1.D1 R9.2
N$9: IC9.E1 R2.2
N$10: U1.P$L1
N$11: U1.P$M2
N$12: U1.P$N1
N$13: U1.P$P2
N$14: U1.P$R1
N$15: U1.P$T2
N$17: C20.1 U1.P$AC5
N$18: C6.1 U1.P$W1 U1.P$Y2
N$20: C17.2 U1.P$D2 X2.1
N$21: C5.1 U1.P$C1
N$22: C14.1 U1.P$B1
N$23: L2.2 L3.1
N$24: U1.P$A14
N$25: U1.P$B13
N$26: U1.P$A12
N$27: U1.P$B11
N$28: U1.P$A10
N$29: U1.P$B9
N$30: L2.1 U1.P$B3
N$31: C2.1 U1.P$A23 X1.3
N$32: C13.1 U1.P$A18
N$33: C12.1 U1.P$A22
N$34: C11.1 U1.P$D23
N$35: C10.1 C15.1 C16.1 L3.2 U1.P$B5 U1.P$E24
N$36: C1.1 U1.P$B24 X1.1
N$37: U1.P$AC9
N$38: ANT1.1 C4.1 C22.1 L1.2
N$39: U1.P$AD10
N$40: U1.P$R24
N$41: C8.1 U1.P$AD23
N$42: U1.P$P23
N$43: C9.1 U1.P$N24
N$44: U1.P$L24
N$45: U1.P$J24
N$46: C3.1 L1.1 U1.P$H23
N$47: U1.P$W24
N$48: U1.P$AC11
N$49: U1.P$AD12
N$50: U1.P$AC13
N$51: C7.1 U1.P$AD14
N$52: U1.P$AC19
N$53: U1.P$AD20
N$54: U1.P$AC21
N$55: U1.P$AD22
N$56: C21.1 U1.P$AD2
N$57: Q3.2 R1_EP_DR.2
N$58: J2.2
N$60: R1_EP_DR.1 R_TYPE_SEL.2 SJ1.2
N$66: EPD_C2.2 J1.4
N$67: EPD_C1.2 J1.5
N$69: EPD_C6.2 J1.18
N$70: EPD_C7.2 J1.19
N$71: EPD_C8.2 J1.20
N$73: EPD_C10.2 J1.22
N$75: EPD_C12.2 J1.24
N$80: C32.2 IC2.A2
N$83: TP_VBAT.TP
N$90: J4.A5 R1_USB.2
N$91: J4.A6
N$92: J4.A7
N$93: J4.B5 R2_USB.1
N$94: C42.1 C43.1
N$95: D3.6
N$96: D3.5
N$97: D3.4
N$98: D3.3
N$99: D3.1
N$100: J4.B6
N$101: J4.B7
N$102: J4.A4_B9 J4.A9_B4
N$103: TP_OP.TP
N$104: TP_ON.TP
OUT+: IC2.A3
OUT-: IC2.C3
P0.01/XL2: C18.2 U1.P$F2 X2.2
P0.04: U1.P$J1
P0.13: C30.2 R5.1 SW_UP.2 U1.P$AD8
P0.14: C31.2 R8.1 SW_ENT.2
P0.19: U1.P$AC15
P0.20: U1.P$AD16
P0.21: U1.P$AC17
P0.22: U1.P$AD18
P0.26: U1.P$G1
P0.27: U1.P$H2
P0.31: U1.P$A8
P1.01: Q1.1 R_PWR_EPD.1 U1.P$Y23
P1.02: C29.2 R7.1 SW_DW.2
P1.03: U1.P$V23
P1.04: U1.P$U24
P1.05: U1.P$T23
P1.10: U1.P$A20
P1.11: U1.P$B19
P1.12: U1.P$B17
P1.13: U1.P$A16
P1.14: U1.P$B15
PMIC_INT: IC1.A1
PREVGH: D5.1 EPD_C9.2 J1.21
PREVGL: D2.2 EPD_C11.2 J1.23
RESET: J1.3 J2.6
SCK: J1.13
SCL: IC1.B1 IC2.C1 IC3.12 R4.1 R17.2 TP_SCL.TP U3.7
SDA: IC1.C1 IC2.B2 IC3.2 R2.1 R18.2 TP_SDA.TP U3.8
SWDCLK: J2.4 U1.P$AA24
SWDIO: U1.P$AC24
VBAT: C27.2 C37.2 IC1.C2 U3.2 U3.3
VBUS: C38.2 IC1.A2
VREG: C23.1 C24.2 C39.1 IC1.B2 IC9.A1 IC9.A2 IC9.A3 TP_VREG.TP

## Tracks (layer width: path | path; a pad name or v marks a point on that pad's centre or on a via)
3V3  (via drill 0.2)  (4 unrouted)
  Top 0.3: 6.87,28.3 7.12,28.04 C33.1 | 6.87,28.3 7.12,28.55 7.12,29.18 C25.1 7.15,29.4 5.85,30.7 5,30.7 4.7,30.4 4.7,29.6 IC9.E3 IC9.E2 | 6.87,28.3 C33.1 | 8.75,8.76 9.1,9.12 9.1,10.1 8.31,10.1 7.85,9.64 7.85,9.28 7.89,9.24 7.51,9.24 7.15,8.89 IC3.10 | R17.1 39.51,6.71 40.14,6.71 R18.1 40.27,6.71 v40.27,7.21 | J2.1 38.11,25.25 37.86,24.99 35.38,24.99 34.78,25.59 | 8.75,8.48 v9.16,8.48 11.44,8.48 12.26,7.67 29.88,7.67 v30.24,7.31 | v7.76,27.28 7.76,27.41 7.25,27.91 C33.1 | 34.78,30.3 34.78,32.02 33.31,33.5 31.38,33.5 TP_3V3.TP 30.9,33.6 v29.1,31.8 | 34.78,30.3 34.78,25.59 | IC2.C2 41.27,30.71 41.27,30.61 40.95,30.3 | v11.32,5.69 10.94,5.31 R5.2 | v21.86,5.94 21.86,5.31 R8.2 | v26.81,5.69 32.52,5.69 32.77,5.44 R7.2 | 34.78,25.59 33.8,24.61 32.02,24.61 Q1.2 31.95,23.27 R_PWR_EPD.2 | 34.78,30.3 40.95,30.3 | 40.95,30.3 42.61,30.3 C34.2
  Bottom 0.3: v40.27,7.21 40.17,7.31 v30.24,7.31 | 7.76,27 7.76,8.49 8.21,8.04 8.8,8.04 9.16,8.4 v9.16,8.48 | 7.76,27 v7.76,27.28 | v26.81,5.69 22.11,5.69 v21.86,5.94 21.6,5.69 v11.32,5.69 11.32,5.78 9.45,7.65 9.45,8.25 9.26,8.44 | 7.76,27 9,28.24 9,32.1 10,33.1 16.8,33.1 17,32.9 17,31.9 17.3,31.6 28.7,31.6 28.9,31.8 v29.1,31.8
EPD_3V3  (via drill 0.2)  (1 unrouted)
  Top 0.3: J1.16 10.68,15.85 10.68,16.23 J1.15 11.14,16.26 v11.44,16.56 | 14.6,19.25 13.35,18.01 | 13.35,18.01 12.84,17.5 | C1-EP-DR.1 12.97,22.07 13.7,21.34 16.34,21.34 16.62,21.06 16.62,20.42 16.4,20.19 14.69,20.19 14.48,19.98 14.48,19.37 14.6,19.25 | 13.35,18.01 v13.22,18.01 | 14.6,19.25 16.04,17.81 22.9,17.81 23.13,18.04 23.13,19.91 22.87,20.17 22.87,20.43 22.6,20.7 22.6,21.7 22.7,21.7 22.9,21.9 22.87,24.46 23.51,25.09 23.96,25.09 26.5,27.63 30.31,27.63 30.37,27.58 30.37,27.15 30.87,26.64 Q1.3 | v17.03,21.82 18.81,23.6 18.81,24.14 L5.2
  Bottom 0.3: v11.44,16.56 12.89,18.01 v13.22,18.01 v17.03,21.82
EPD_CS  (via drill 0.2)
  Top 0.15: J1.12 9.85,17.75 9.7,17.6 v9.7,15.6
  Bottom 0.15: v9.7,15.6 24.1,15.6 27.4,18.9 28.6,18.9 28.8,18.7 28.8,14.1 29.3,13.6 U1.P$K2
  other vias: 29.95,13.6
GDR
  Top 0.127: 11.19,22.71 10.68,22.71 J1.2 | 11.19,22.71 13.09,20.8 15.63,20.8 Q3.1 | 11.19,22.71 11.72,22.71 R2_EP_DR.2
GND  (via drill 0.2)  (5 unrouted)
  Top 0.127: R2_EP_DR.1 11.8,23.6 11.8,23.7
  Top 0.3: 13.83,10.77 12.9,11.7 12.4,11.7 | 12.43,12.29 EPD_C10.1 12.45,11.75 12.4,11.7 | 12.33,17.5 12.33,16.61 EPD_C6.1 12.12,16.5 11.1,15.3 11.04,15.24 10.63,15.24 J1.17 10.55,15.21 10.1,15.21 9.41,14.53 9.41,12.07 11.47,10.01 12.21,10.01 EPD_C12.1 12.33,9.88 12.33,9.55 12.49,9.4 13.17,9.4 13.73,9.96 13.73,10.77 13.83,10.77 | 12.33,17.5 12.33,18.39 EPD_C2.1 12.33,18.52 12.33,19.53 EPD_C1.1 12.14,19.76 10.63,19.76 J1.8 10.55,19.79 10.1,19.79 9.41,20.48 9.41,23.03 10.07,23.7 11.8,23.7 | 12.33,17.5 EPD_C5.1 | 16.27,27.94 16.27,28.62 15.86,29.03 15.86,29.95 | 15.63,29.06 U3.9 15.45,29.09 14.87,28.52 14.87,28.04 U3.1 14.74,27.91 14.49,27.91 14.49,28.01 | 12.97,23.6 12.97,26.49 14.49,28.01 | 12.97,23.6 12.97,23.47 C1-EP-DR.2 12.97,23.6 | 15.38,31.22 15.13,31.47 12.71,31.47 12.46,31.22 12.26,31.22 C39.2 12.21,31.04 | C27.1 15.8,30.8 | 15.8,30.8 15.38,31.22 | 12.21,31.04 12.75,29.93 R9.1 13.47,29.88 13.5,29.9 14.49,28.91 14.49,28.01 | 10.73,33.04 9.39,31.7 9.39,29.84 9.59,29.64 | 15.94,31.22 18.09,33.37 J4.SH2 | 15.38,31.22 15.94,31.22 | 12.97,23.6 11.8,23.6 | R_TYPE_SEL.1 19.06,19.28 19.44,19.66 19.44,20.14 21.22,20.14 | 21.22,20.14 21.38,20.14 22.24,19.28 22.24,19.02 SJ1.1 | 22.82,25.45 23.76,26.39 D4.1 23.89,26.52 24.24,26.52 26.18,28.45 26.18,28.93 J4.A1_B12 26.3,29.06 26.68,29.44 27.32,29.44 J4.SH3 27.45,29.56 28.39,30.51 | 22.82,25.45 22.42,25.05 22.42,22.15 21.48,21.21 21.48,20.4 21.22,20.14 | C43.2 34.05,30.58 34.3,30.84 34.3,31.82 34.14,31.98 C42.2 33.71,32.08 32.48,32.08 31.2,31.9 30.6,31.3 30.6,30.3 30.5,30.2 29.6,30.2 D3.2 | 29.22,30.2 29.48,30.2 D3.2
  Top 0.3: 27.93,31.6 27.6,31.6 27.5,31.7 19.09,31.7 18.94,31.85 18.02,31.85 R1_USB.1 | 28.46,31.85 28.46,32.61 27.45,33.62 27.45,33.63 J4.SH1 | 28.44,31.83 R2_USB.2 28.08,31.34 28.39,31.04 28.39,30.51 | R3.1 6.16,9.04 6.16,9.07 7.97,10.88 J1.MP2 | C25.2 8.52,29.18 8.52,28.04 C33.2 8.39,27.91 8.39,27.08 7.99,26.68 6.42,26.68 6.3,26.8 6.3,27.9 6,28.2 IC9.B1 IC9.C1 IC9.C2 IC9.C3 3.4,28.6 v3.3,28.7 | 8.01,23.98 8.01,11.02 | 8.01,23.98 J1.MP1 | 12.33,15.34 12.33,14.32 EPD_C8.1 12.33,14.2 12.33,13.31 EPD_C9.1 12.21,13.18 v11.7,13.18 | IC3.9 7.73,8.61 7.91,8.61 8.46,9.15 C19.2 | v11.95,27.94 11.61,28.28 11.67,28.43 IC1.D2 | 18.68,29.44 19.06,29.06 19.7,29.06 J4.A12_B1 19.82,28.93 19.82,28.45 22.82,25.45 | 18.68,29.44 J4.SH4 18.67,29.55 | 35.06,5.18 35.06,4.55 35.32,4.29 SW_DW.1 35.45,4.16 36.97,4.16 39.26,1.88 40.27,1.88 41.3,2.91 41.3,9.3 40.97,9.63 40.7,9.63 | SW_UP.1 13.35,4.29 13.09,4.55 13.09,5.18 13.06,5.21 13.06,5.47 14.45,6.86 23.99,6.86 24.27,6.58 24.27,5.31 | 24.27,5.18 24.27,4.42 24.4,4.29 SW_ENT.1 24.52,4.29 25.4,5.3 25.8,5.7 26,5.7 26.4,6.1 26.4,6.2 32.73,6.2 33.61,5.31 35.06,5.31 | C11.2 37.96,15.6 37.73,15.82 36.69,15.82 v36.59,15.72 | 35.45,14.58 34.81,14.58 34.56,14.83 | 31,14.96 31.13,15.09 31.13,15.85 U1.P$B7 | 31,12.42 31,11.4 U1.P$87 | 31,12.42 U1.P$83 | 31,12.42 U1.P$74 | 31.51,14.32 31,13.82 U1.P$79 | 32.14,12.42 32.14,11.4 U1.P$88 | 32.14,12.42 U1.P$84 | 32.14,12.42 U1.P$74 | U1.P$80 32.02,13.82 U1.P$74 | 33.29,12.42 33.29,11.4 U1.P$89 | 33.29,12.42 U1.P$85 | 33.29,12.42 U1.P$74 | U1.P$81 33.41,13.82 U1.P$74 | 34.56,12.42 34.56,11.4 U1.P$90 | 34.56,12.42 U1.P$86
  Top 0.3: 34.56,12.42 U1.P$74 | 33.92,14.32 34.43,13.82 U1.P$82 | 31,14.96 U1.P$75 | 31,14.96 U1.P$74 | 31.51,14.32 32.02,14.83 U1.P$76 | 31.51,14.32 U1.P$74 | 33.92,14.32 33.41,14.83 U1.P$77 | 33.92,14.32 U1.P$74 | 35.45,14.58 35.57,14.45 36.56,14.45 36.94,14.07 37.35,14.07 X1.4 37.62,13.9 38.59,12.93 38.75,12.93 X1.2 38.88,12.8 39.16,12.8 39.86,12.1 40.4,12.1 | 35.45,14.58 U1.P$F23 | 34.56,14.83 U1.P$78 | 34.56,14.83 U1.P$74 | C3.2 37.86,11.4 37.86,10.52 C9.2 37.86,10.39 37.86,9.8 C8.2 | 37.48,19.53 37.48,18.39 C16.2 38,18.84 39.13,18.84 39.6,18.37 C13.2 39.51,18.14 39.51,16.86 C12.2 39.51,16.74 39.51,15.57 | 39.51,15.57 39.51,15.47 | 39.51,15.47 39.51,15.34 C10.2 39.51,15.47 | 39.51,15.57 40.65,14.43 40.65,14.2 C1.2 40.72,14.04 C2.2 40.86,12.6 40.86,12.17 40.7,12.1 40.4,12.1 | 40.65,25.37 39.51,25.37 J2.3 | IC2.B1 40.78,31.34 39.28,31.34 39.28,31.66 | 40.89,25.27 41.62,26.01 42.3,26.01 42.9,26.6 | 42.9,26.6 43.11,26.82 43.11,30.2 | 40.78,25.37 J2.5 | C8.2 37.66,9.32 37.14,8.81 | 37.11,8.81 35.72,9.1 C7.2 34.18,8.98 34.18,8.56 33.8,8.18 30.53,8.18 | 25.76,14.92 C18.1 25.76,15.09 25.16,15.09 | 24.4,13.44 24.4,14.32 25.16,15.09 | 24.4,13.44 26.33,11.5 C6.2 C20.2 26.75,8.92 27.5,8.18 30.53,8.18 | 40.7,9.63 37.73,9.63 C8.2 | 25.16,15.09 26.84,16.76 | 26.84,16.76 28.31,18.23 31.99,18.23 32.34,17.88 32.52,17.88 C5.2 32.65,17.88 33.03,17.88 33.8,18.64 C14.2 33.92,18.77 33.92,19.35 34.71,20.14 40.04,20.14 42.9,23 42.9,26.6 | 13.83,10.77 21.73,10.77 24.4,13.44 | 15.94,31.22 16.9,31.22 18.68,29.44 | 8.01,26.66 8.01,23.98 | 26.84,16.76 27.58,16.76 C17.1 | 2.45,25.43 2.79,25.6 3,25.6 v3.1,25.5 | TP_BAT_GND.TP 12.21,31.59 12.21,31.04
  Top 0.3: 40.7,9.63 41.16,10.09 41.16,10.52 | 39.28,31.74 39.28,32.15 39.71,32.59 42.17,32.59 42.6,32.15 42.6,31.6 | 12.4,11.7 12.2,11.7 12.14,11.64 EPD_C11.1 | v3.7,30.3 C24.1 | 30.53,8.18 30.55,8.2 C21.2 | 10.28,28.3 9.71,28.3 9.59,28.41 9.59,29.64 | C37.1 10.02,29.21 9.59,29.64 | 40.4,12.1 40.4,11.75 C4.2 | 28.39,30.51 28.8,30.1 D3.2 | U3.6 15.8,30.04 15.8,30.8 | C34.1 43.19,30.3 43.19,30.81 42.5,31.5 41.9,31.5 IC2.B3
  Bottom 0.3: J4.SH4 18.55,29.44 17.06,27.94 v11.95,27.94 11.85,27.94 11.8,27.5 11.3,27 8.9,27 8.41,26.51 8.41,10.26 | v36.59,15.72 36.05,15.72 35.29,14.96 34.56,14.96 U1.P$78 | v11.7,13.18 8.43,13.18 | v3.1,25.5 3.1,28.5 v3.3,28.7 3.8,29.2 3.8,30.2 v3.7,30.3
  other vias: 8.46,9.4
  pour Top: 7,0 8.9,-0.1 9,0 9,4.5 5.4,8.1 5.4,10.6 0,10.6 0,10.6 7,10.6 7,24.4 0,24.4 0,28 arc-90 7,35 39,35 arc-90 46,28 45.9,7.1 arc-90 39,0 36.4,0 36.4,1.8 31.6,1.8 31.6,0 25.4,0 25.4,1.8 20.6,1.8 20.6,0 14.4,0 14.4,1.8 9.6,1.8 9.6,0
  pour Bottom: 7,0 8.8,0 9.1,0.3 9.1,5.6 7.5,5.6 6.6,6.5 6.6,7.9 6.5,8 5.5,8 5.5,10.6 5.4,10.7 2.9,10.6 0,10.6 0,10.6 7,10.6 7,24.4 0,24.4 0,28 arc-90 7,35 39,35 arc-90 46,28 45.9,15.9 45.9,7.1 arc-90 39,0 36.4,0 36.4,1.8 31.6,1.8 31.6,0 25.4,0 25.4,1.8 20.6,1.8 20.6,0 14.4,0 14.4,1.8 9.6,1.8 9.6,0
HAPTIC_EN  (via drill 0.2)
  Bottom 0.127: IC2.A1 41.4,31.9 41.9,31.4 43.3,31.4 43.5,31.2 43.5,23.1 41.3,20.9 41.3,9.4 41.1,9.2 29.5,9.2 29.4,9.3 29.4,11.8 U1.P$U1
  other vias: 40.8,31.9 29.45,11.85
LX1
  Top 0.15: L7.1 3.83,27.3 4.73,28.2 IC9.B3 IC9.B2
LX2
  Top 0.15: L7.2 1.77,28.9 2.47,29.6 4.2,29.6 4.8,29 IC9.D3 IC9.D2
N$2
  Top 0.127: IC3.1 6.96,7.03 6.1,7.91 R3.2
N$3
  Top 0.127: C2-EP-DR.2 21.73,22.58 20.21,21.06 D5.2 20.08,21.06 18.81,21.06 17.92,20.17 Q3.3 17.79,20.17 17.79,20.42 14.36,23.85 14.36,24.23 L5.1
N$5  (1 unrouted)
  Top 0.127: 20.46,24.1 C2-EP-DR.1 | 20.59,24.23 D2.1 20.59,24.36 20.46,24.48 20.46,26.39 D4.2
N$6  (via drill 0.2)
  Top 0.15: v8.52,30.2 8.01,30.2 R4.2 | v6.41,29.48 5.94,29 IC9.D1
  Bottom 0.15: v8.52,30.2 6.82,30.2 6.41,29.79 v6.41,29.48
N$7
  Top 0.127: IC1.D1 11.19,28.42 11.19,28.17 11.82,27.53 12.08,27.53 12.59,28.04 12.59,29.21 12.7,29.32 R9.2
N$9  (via drill 0.2)
  Top 0.15: v6.49,30.71 6.68,30.52 6.69,30.52 R2.2 | v5.7,30.11 IC9.E1
  Bottom 0.15: v5.7,30.11 5.9,30.11 v6.49,30.71
N$17  (1 unrouted)
  Top 0.15: 28.06,9.95 28.38,10.26 30.11,10.26 30.24,10.39 30.62,10.39 U1.P$AC5
N$18  (1 unrouted)
  Top 0.15: 29.48,11.28 29.6,11.15 29.98,11.15 U1.P$Y2 | 29.48,11.28 28.25,11.28 28.06,11.47 | 29.48,11.28 U1.P$W1
N$20
  Top 0.127: U1.P$D2 29.85,15 28.8,15 28.8,16.05 C17.2 28.25,16 X2.1
N$21
  Top 0.15: U1.P$C1 29.48,15.34 29.1,15.72 29.1,16.23 30.75,17.88 31.76,17.88 32.27,17.37 32.52,17.37 C5.1
N$22  (via drill 0.2)
  Top 0.15: v29.73,16.23 29.73,16.1 29.48,15.85 U1.P$B1 | v31.89,16.86 33.29,16.86 33.8,17.37 C14.1
  Bottom 0.15: v29.73,16.23 29.98,16.23 30.62,16.86 v31.89,16.86
N$23
  Top 0.127: L3.1 34.81,17.75 34.81,18.01 35.7,18.9 35.7,19.15 L2.2
N$30  (via drill 0.2)
  Top 0.15: v31.13,17.37 30.24,16.48 30.24,15.85 U1.P$B3 | v34.68,18.52 34.68,19.15 L2.1
  Bottom 0.15: v31.13,17.37 33.54,17.37 v34.68,18.52
N$31  (via drill 0.2)
  Top 0.15: v36.59,16.99 35.95,16.36 U1.P$A23 | C2.1 v39.76,13.18 39.38,13.56 39.26,13.56 38.88,13.94 X1.3
  Bottom 0.15: v36.59,16.99 36.59,16.36 37.61,15.34 37.61,14.58 39,13.18 v39.76,13.18
N$32
  Top 0.15: U1.P$A18 34.05,16.36 34.05,16.48 34.68,17.12 36.08,17.12 36.84,17.88 38.62,17.88 38.88,18.14 C13.1
N$33  (via drill 0.2)
  Top 0.127: v35.45,15.85 34.94,16.36 U1.P$A22 | v37.99,16.74 38.88,16.74 C12.1
  Power 0.127: v35.45,15.85 35.83,15.85 36.34,16.36 37.61,16.36 v37.99,16.74
N$34
  Top 0.127: U1.P$D23 35.45,15.09 35.7,15.09 35.83,15.21 37.35,15.21 C11.1
N$35  (via drill 0.2)
  Top 0.15: v30.75,16.36 30.75,15.85 U1.P$B5 | 35.83,18.26 35.83,17.75 L3.2 | v38.11,14.71 37.99,14.83 35.95,14.83 U1.P$E24 | v38.88,15.98 38.88,15.34 C10.1 | 35.83,18.26 36.84,18.26 C16.1 36.84,18.39 36.84,19.53 C15.1 | 35.83,18.26 v35.83,18.39
  Bottom 0.15: v30.75,16.36 33.8,16.36 v35.83,18.39 36.93,18.39 39.04,16.28 39.04,16.14 v38.88,15.98 38.24,15.98 38.11,15.85 v38.11,14.71
N$36  (via drill 0.2)
  Top 0.15: U1.P$B24 36.34,16.23 37.83,16.23 38.49,15.57 38.49,15.09 38.88,14.71 v39.51,14.71 39.64,14.71 40.14,14.2 C1.1 | v36.46,12.93 37.35,12.93 X1.1
  Power 0.15: v36.46,12.93 37.73,12.93 v39.51,14.71
N$38  (via drill 0.2)
  Top 0.15: C22.1 40.65,10.64 40.56,10.64 | L1.2 40.56,10.64 | 40.56,10.64 40.6,10.6 C22.1 | C22.1 40.75,10.95 41.05,11.25 C4.1 41.3,11.84 42.16,11.84 42.3,11.7 v42.3,6.7 | v11.3,7.3 10.1,6.1 9.3,6.1 6.68,3.48 ANT1.1
  Bottom 0.15: v42.3,6.7 42.3,6.4 42.2,6.3 27.2,6.3 26.2,7.3 v11.3,7.3
N$41
  Top 0.127: U1.P$AD23 35.45,9.75 36.97,9.75 37.1,9.63 C8.1
N$43
  Top 0.127: U1.P$N24 35.95,12.8 36.97,11.79 36.97,10.77 37.22,10.52 C9.1
N$46  (via drill 0.2)
  Top 0.15: v36.46,13.82 36.08,14.2 35.45,14.2 U1.P$H23 | v39.38,10.77 38.75,11.4 L1.1 38.62,11.53 38.14,12.01 37.7,12.01 37.35,11.66 37.35,11.53 C3.1
  Bottom 0.15: v36.46,13.82 39.38,10.9 v39.38,10.77
N$51
  Top 0.15: U1.P$AD14 32.91,9.75 32.91,9.37 33.09,9.19 C7.1
N$56
  Top 0.15: U1.P$AD2 29.98,9.75 29.98,9.06 29.92,9 C21.1
N$57
  Top 0.127: R1_EP_DR.2 18.17,19.28 18.17,19.41 17.92,19.66 15.89,19.66 15.76,19.53 Q3.2
N$60
  Top 0.127: R1_EP_DR.1 17.79,19.15 17.79,19.02 18.05,18.77 18.94,18.77 R_TYPE_SEL.2 19.06,18.77 20.59,18.77 20.71,18.9 SJ1.2
N$66
  Top 0.127: EPD_C2.2 12.84,18.52 12.84,19.02 13.09,19.28 13.09,19.91 11.32,21.69 10.68,21.69 J1.4
N$67
  Top 0.127: EPD_C1.2 12.71,19.66 12.71,19.79 11.32,21.18 10.68,21.18 J1.5
N$69
  Top 0.127: EPD_C6.2 12.71,16.48 12.71,16.23 12.33,15.85 12.04,15.85 11.55,15.25 11.13,14.83 10.68,14.83 J1.18
N$70  (via drill 0.2)
  Top 0.127: v13.22,14.96 12.84,15.34 EPD_C7.2 | v11.82,14.96 11.19,14.32 10.68,14.32 J1.19
  Bottom 0.127: v11.82,14.96 v13.22,14.96
N$71  (via drill 0.2)
  Top 0.127: v13.22,13.82 12.84,14.2 EPD_C8.2 | v11.7,14.07 11.32,14.07 11.06,13.82 10.68,13.82 J1.20
  Bottom 0.127: v13.22,13.82 11.95,13.82 v11.7,14.07
N$73
  Top 0.127: J1.22 10.65,12.77 12.83,12.77 12.96,12.61 EPD_C10.2
N$75
  Top 0.127: EPD_C12.2 12.71,10.01 12.71,10.26 12.33,10.64 11.7,10.64 10.68,11.66 J1.24
N$80
  Top 0.127: IC2.A2 41.29,31.98 41.03,32.23 40.65,32.23 40.22,31.8 C32.2
N$90
  Top 0.15: R1_USB.2 18.02,31.34 22.49,31.34 24.14,29.69 24.14,29.06 J4.A5
N$93
  Top 0.15: J4.B5 21.22,29.06 21.22,29.92 20.31,30.84 17.92,30.84 17.41,31.34 17.41,32.11 17.67,32.36 19.01,32.36 19.29,32.08 R2_USB.1
N$94  (1 unrouted)
  Top 0.15: 33.8,31.6 33.29,31.09 33.29,29.95 33.92,29.31 C43.1
N$102
  Top 0.127: J4.A9_B4 20.71,28.93 20.71,28.42 20.97,28.17 25.03,28.17 25.29,28.42 25.29,28.93 J4.A4_B9
P0.01/XL2
  Top 0.15: U1.P$F2 29.85,14.7 28.45,14.7 27.7,13.95 X2.2 26.36,14.29 C18.2
P0.13  (via drill 0.2)
  Top 0.127: 24.32,7.21 24.65,6.88 24.65,5.31 C30.2 | 24.32,7.21 12.21,7.21 10.3,5.31 R5.1 10.43,5.18 10.55,5.05 10.55,4.29 SW_UP.2 | 24.32,7.21 29.69,7.21 30,6.9 33.5,6.9 v34.8,8.2 | v31.8,8.7 31.45,9.05 U1.P$AD8
  Bottom 0.127: v34.8,8.2 32.3,8.2 v31.8,8.7
P0.14  (via drill 0.2)
  Top 0.15: v25.95,6.45 26.05,6.55 34.33,6.55 35.45,5.44 35.45,5.3 35.45,5.24 C31.2 | v23.76,6.35 21.63,6.35 21.35,6.07 21.35,5.31 R8.1 21.35,5.18 21.48,5.05 21.48,4.29 SW_ENT.2
  Bottom 0.15: v25.95,6.45 25.85,6.35 v23.76,6.35
P1.01  (via drill 0.2)
  Top 0.127: R_PWR_EPD.1 30.05,24.44 Q1.1 30.05,19.85 29.2,19 v29.25,18.95
  Bottom 0.127: v29.25,18.95 29.25,14.45 29.4,14.3 34.9,14.3 35.4,13.8 35.4,11.1 U1.P$Y23
  other vias: 35.45,11.1
P1.02  (via drill 0.2)
  Top 0.15: v13.98,5.18 13.47,5.18 C29.2 | v26.05,5.18 32.21,5.18 R7.1 32.23,5.03 32.52,4.73 32.52,4.29 SW_DW.2
  Bottom 0.15: v26.05,5.18 v13.98,5.18
PREVGH  (via drill 0.2)
  Top 0.127: 13.59,13.31 19.08,13.31 23.64,17.86 23.64,21.06 D5.1 | 13.59,13.31 12.84,13.31 EPD_C9.2 | v9.92,12.67 9.92,12.93 10.17,13.18 10.55,13.18 J1.21 | 13.59,13.31 v13.59,12.67
  Bottom 0.127: v13.59,12.67 v9.92,12.67
PREVGL  (via drill 0.2)
  Top 0.127: v13.12,10.64 EPD_C11.2 | v11.7,12.17 10.68,12.17 J1.23 | v24.52,21.82 24.27,22.07 24.27,24.23 D2.2 | v16.6,13.9 v19.8,17.1
  Bottom 0.127: v11.7,12.17 11.7,12.07 v13.12,10.64 13.35,10.64 v16.6,13.89 v16.6,13.9 | v19.8,17.1 v24.52,21.82
RESET  (via drill 0.2)
  Top 0.127: v9.92,22.33 10.55,22.33 J1.3 | v40.14,26.01 40.65,26.52 J2.6
  Bottom 0.127: v9.92,22.33 33.67,22.33 36.34,24.99 39.13,24.99 v40.14,26.01
SCL  (via drill 0.2)  (1 unrouted)
  Top 0.15: R17.2 39.51,6.07 39.51,3.71 TP_SCL.TP | 9.97,27.71 9.7,27.7 9.03,28.37 9.03,30.33 8.65,30.71 8.01,30.71 R4.1 | IC1.B1 11.14,29.36 10.68,28.9 10.68,28.17 10.43,27.91 10.17,27.91 8.96,26.7 v8.96,26 8.96,11.06 | 8.96,11.06 8.96,10.85 8.62,10.52 8.2,10.52 6.52,8.84 6.52,7.95 6.87,7.59 7.1,7.59 IC3.12 | 39.38,6.2 R17.2 | v38.88,30.96 40.78,30.96 IC2.C1 | v14.9,30.96 14.9,30.81 15.25,30.45 15.25,30.07 U3.7 | v35.7,7.8 35.7,6.3 35.88,6.12 R17.2 | v9.1,11.2 8.96,11.06
  Bottom 0.15: v14.9,30.96 21.1,30.96 | 21.1,30.96 v38.88,30.96 | v35.7,7.8 12.5,7.8 v9.1,11.2 | v8.96,26 11.3,26 12.4,27.1 12.4,27.2 12.5,27.3 19,27.3 21.1,29.4 21.1,30.96
SDA  (via drill 0.2)
  Top 0.127: IC1.C1 11.1,28.9 10.9,28.7 10.9,27.8 11.5,27.2 12.4,27.2 13.2,28 v13.2,28.8 | v14.1,30.2 14.63,30.2 U3.8 | v14.1,32.1 14.9,32.9 TP_SDA.TP
  Top 0.15: TP_SDA.TP 15.69,32.94 15.26,32.94 13.7,34.5 10,34.5 9.5,34 9.5,33.48 R2.1 6.86,31.22 v5.35,31.22 | v40.14,5.56 40.14,6.07 R18.2 | v8.28,6.28 7.61,6.96 IC3.2
  Top 0.3: v17.2,33.7 16.44,32.94 15.69,32.94
  Bottom 0.127: v13.2,28.8 14.1,29.7 v14.1,30.2 v14.1,32.1
  Bottom 0.15: v40.14,5.56 31.76,5.56 29.86,3.66 10.81,3.66 10.59,3.87 10.59,5.97 10.28,6.28 v8.28,6.28 8.27,6.3 7.7,6.3 7.38,6.62 7.38,24.61 5.25,26.74 5.25,31.12 v5.35,31.22
  Bottom 0.3: IC2.B2 39.3,31.4 39.2,31.5 37.9,31.5 37.9,31.4 30.2,31.4 29.7,31.9 29.7,32.2 29.5,32.4 18.2,32.4 17.2,33.4 v17.2,33.7
  other vias: 41.3,31.4
SWDCLK  (via drill 0.2)
  Top 0.15: v36.44,10.77 35.95,10.77 U1.P$AA24 | v38.69,24.54 38.75,24.59 38.75,25.88 39.38,26.52 J2.4
  Bottom 0.15: v36.44,10.77 37.1,10.1 40.5,10.1 40.6,10.2 40.6,20.3 38.49,22.41 38.49,24.34 v38.69,24.54
VBAT  (via drill 0.2)  (1 unrouted)
  Top 0.15: v12.18,28.93 11.67,28.93 11.64,28.9 IC1.C2 | C37.2 10.3,29.77 10.48,29.95 v10.68,29.95 | C27.2 16.4,30.81 16.78,30.43 v16.78,29.1 16.78,27.66 16.52,27.41 16.14,27.41 15.89,27.66 15.89,27.91 U3.3 15.76,28.04 15.38,28.04 U3.2
  Bottom 0.127: 11.6,28.93 12,28.93 v12.18,28.93 12.37,28.93 13,28.3 14,28.3 14.8,29.1 v16.78,29.1 16.8,29.1
  Bottom 0.15: 11.6,28.93 10.68,29.85 v10.68,29.95
VBUS  (via drill 0.2)
  Bottom 0.3: 10.29,28.7 C38.2 10.02,28.69 9.8,28.9 9.8,30.3 9.9,30.4 11.3,30.4 11.6,30.1 IC1.A2
  other vias: 10.3,28.69 11.6,29.7
VREG  (via drill 0.2)  (1 unrouted)
  Top 0.3: IC9.A3 IC9.A2 IC9.A1 5.7,25.2 5.41,24.91 2.5,24.91 2.48,24.9 2.3,24.9 | 2.3,24.9 0.8,24.9 0.6,25.1 0.6,28.9 1.25,29.55 C24.2 3.05,32.1 TP_VREG.TP 4.9,32.1 5.2,31.8 7.1,31.8 v9,33.7 | 2.3,24.91 2.3,24.9 | v12.9,34.1 13,34 v13,32.6 | v9.95,31.1 C39.1 11.75,30.2 12,30.2 12.1,30.1 12.1,29.6 11.8,29.3 IC1.B2
  Bottom 0.3: v9,33.7 9.6,34.3 12.7,34.3 v12.9,34.1 | v13,32.6 11.5,31.1 v9.95,31.1
(copper drawn outside any net)
  shapes: Bottom area x1